# Altium PCB Probe.PcbDoc (part 1 of 2)
Units mm, origin at the board's own origin, x right, y up, seen from the top; angles counter-clockwise.
Board outline 70.88 x 20 mm, 4 copper layers (Top, Ground, Signal/Power, Bottom), stack 1.516 mm thick; 62 components, 37 nets, 170 pads, 258 vias.
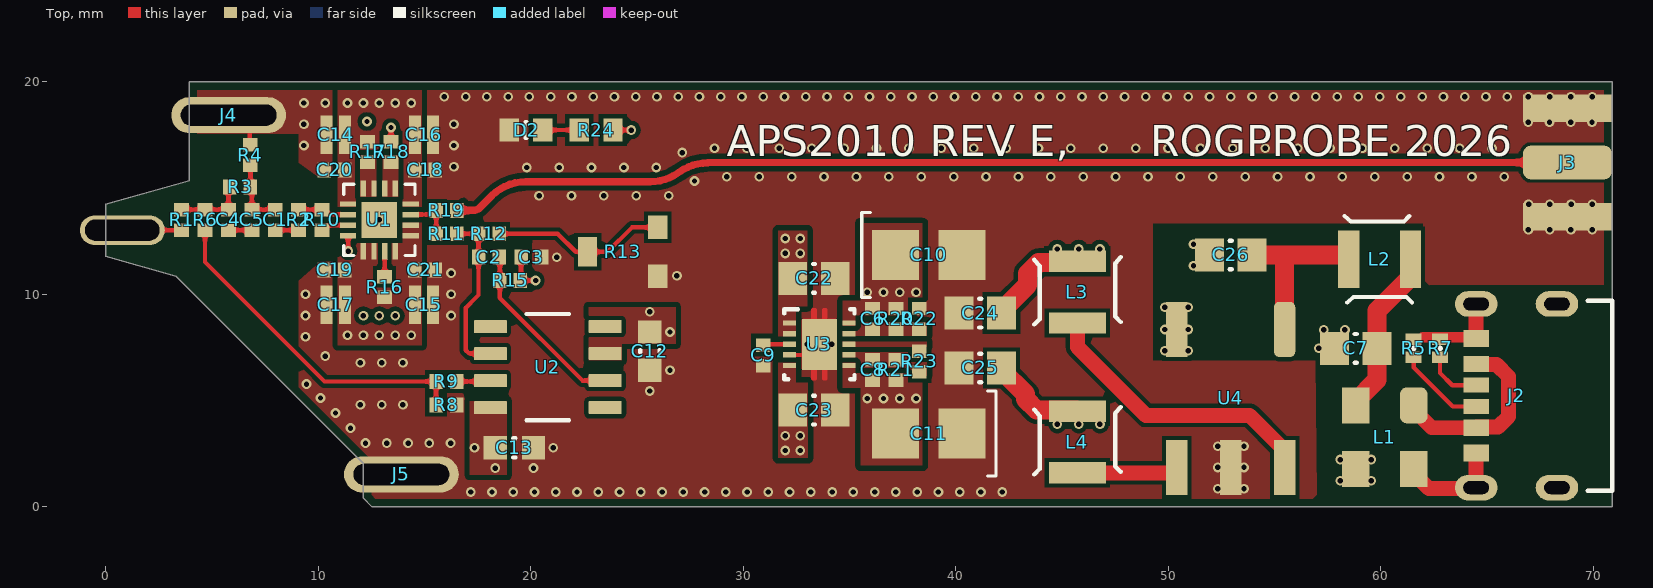
[diagram p0: Top view]
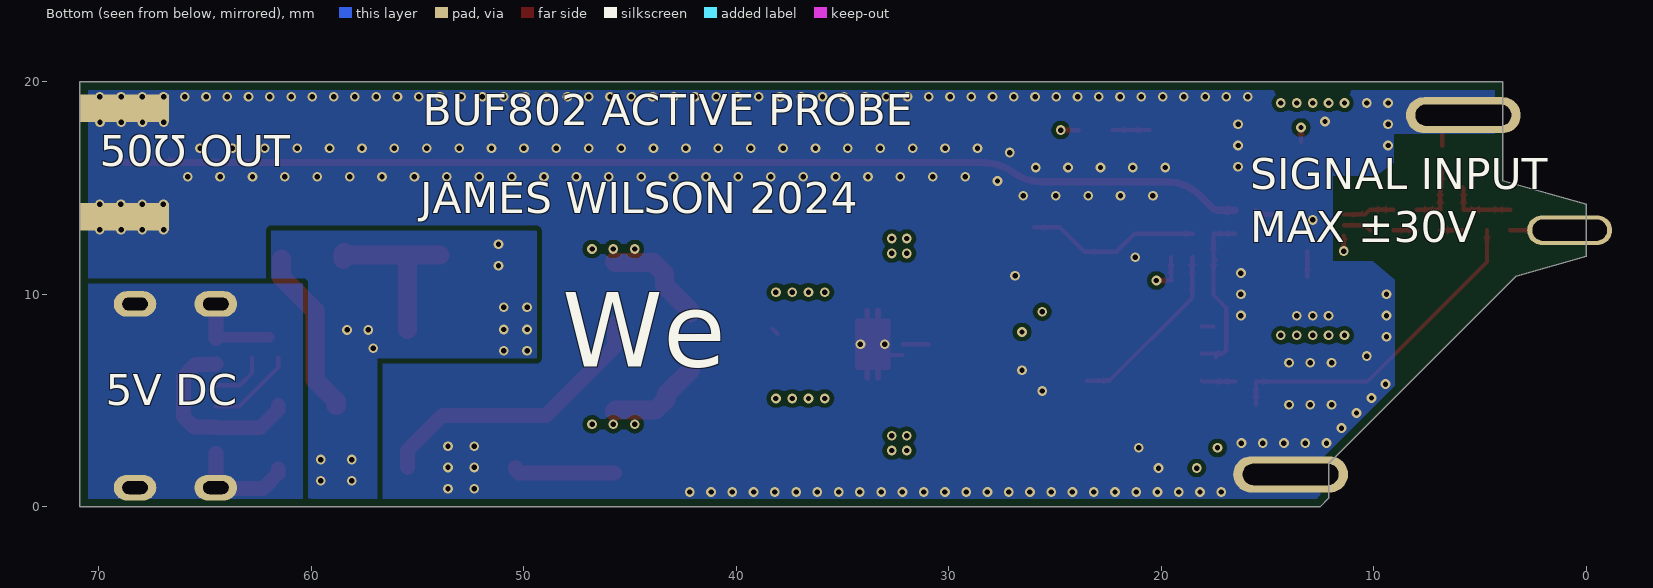
[diagram p1: Bottom view, seen from below]
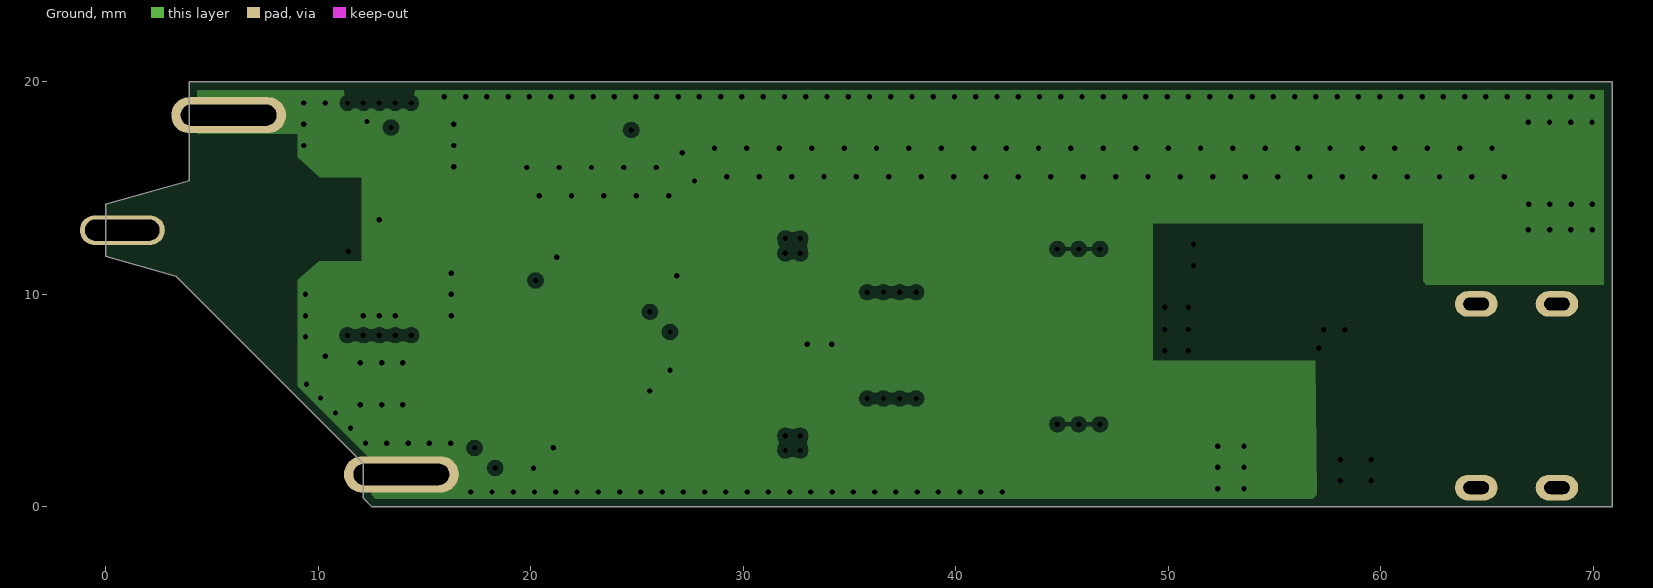
[diagram p2: Ground]
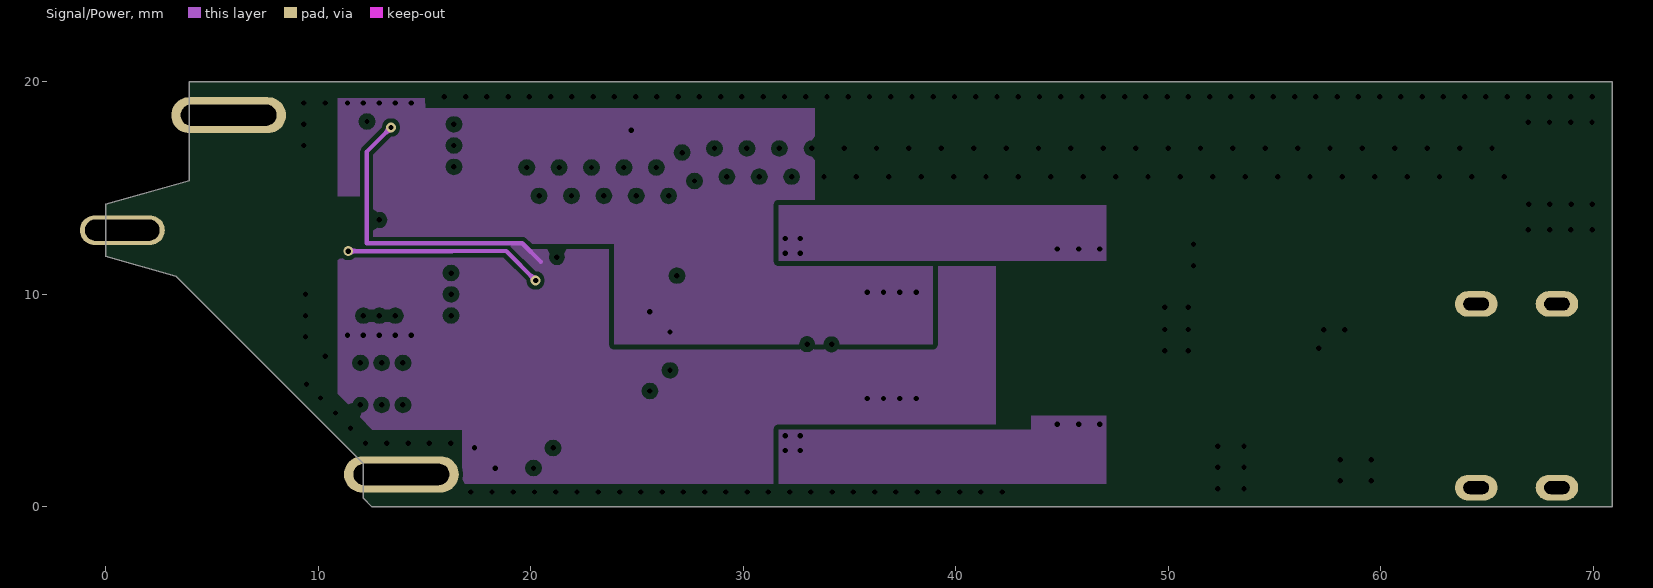
[diagram p3: Signal/Power]
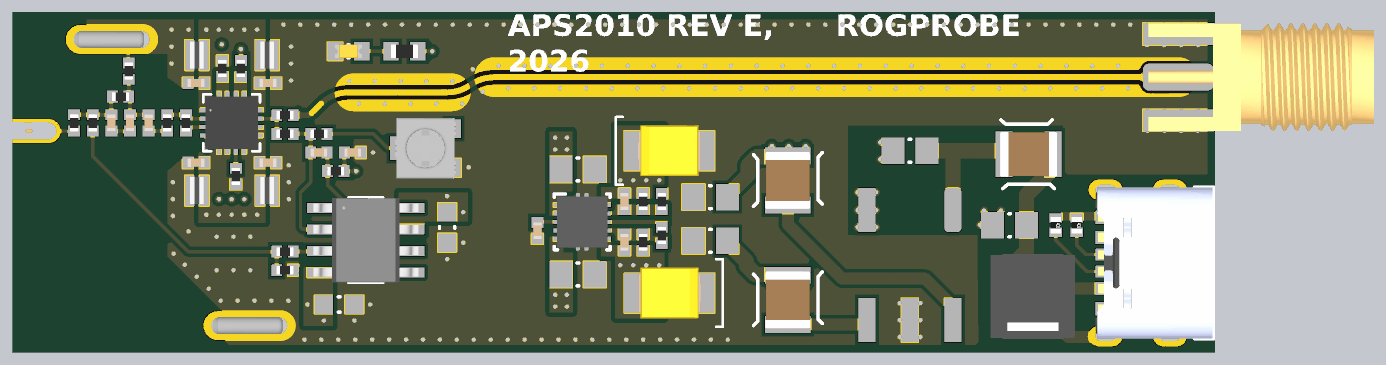
[diagram p4: 3D render of the assembled board from above, using the file's embedded part models]

## Layer stack, top to bottom
Top Solder: solder mask 0.0254, Solder Resist, Dk 3.5
Top: signal copper 0.0432
Dielectric 1: core 0.2022, FR-4, Dk 3.68
Ground: signal copper 0.0173
Dielectric 3: core 0.9906, Dk 3.68
Signal/Power: signal copper 0.0173
Dielectric 4: prepreg 0.2022, Dk 3.68
Bottom: signal copper 0.0432
Bottom Solder: solder mask 0.0254, Solder Resist, Dk 3.5

## Board outline
0,11.791 3.308,10.859 3.301,10.855 12.131,2.025 12.131,0.403 12.535,0 14.156,0 70.881,0 70.881,20 3.931,20 3.931,15.367 3.938,15.342 0,14.244

## Design rules (kind name [scope] priority, off if disabled: settings)
BoardOutlineClearance BoardOutlineClearance_outer [OnCopper and OnOutside] p1: gap=0.381 ignorepadtopadclearanceinfootprint=FALSE except(0: SMDPad-OutlineEdge)
BoardOutlineClearance BoardOutlineClearance_L3 [OnLayer('Signal/Power')] p2: gap=0.762 ignorepadtopadclearanceinfootprint=FALSE
BoardOutlineClearance BoardOutlineClearance_inner [OnCopper and not OnOutside] p3: gap=0.381 ignorepadtopadclearanceinfootprint=FALSE except(0: Fill-OutlineEdge Region-OutlineEdge)
Clearance Clearance_RF_CPWG [InNet('OUT') vs InNet('GND')] p1: gap=0.152 ignorepadtopadclearanceinfootprint=FALSE except(0.254: Arc-Fill Arc-Poly Arc-Region Track-Fill Track-Poly Track-Region Fill-Fill Fill-Poly Fill-Region Poly-Poly Poly-Region Region-Region)
Clearance [All] p2: gap=0.152 ignorepadtopadclearanceinfootprint=FALSE except(0.203: Arc-Poly Track-Poly SMDPad-Poly THPad-Poly Via-Poly; 0.254: Arc-Hole Track-Hole SMDPad-Hole THPad-Hole Via-Hole Fill-Fill Fill-Poly Fill-Region Fill-Hole Poly-Poly Poly-Hole Region-Hole)
HoleSize [All] p1: absolutevalues=TRUE maxlimit=6.35 minlimit=0.254 maxpercent=80.000 minpercent=20.000
MinimumSolderMaskSliver [All] p1: minsoldermaskwidth=0.102
PlaneConnect [All] p1: planeconnectstyle=Direct reliefexpansion=0.508 reliefentries=4 reliefconductorwidth=0.254 reliefairgap=0.254
PolygonConnect PolygonConnect_Relief [InComponentClass('Power plane relief') vs InNet('GND') OR InNet('VEE') OR InNet('VCC')] p1: connectstyle=Relief reliefconductorwidth=0.254 reliefentries=4 polygonreliefangle="90 Angle" airgapwidth=0.203
PolygonConnect [All] p2: connectstyle=Direct reliefconductorwidth=0.254 reliefentries=4 polygonreliefangle="90 Angle" airgapwidth=0.254
RoutingVias [All] p1: holewidth=0.457 width=0.457 viastyle="Through Hole" minholewidth=0.203 minwidth=0.457 maxholewidth=0.711 maxwidth=1.27
SilkToSolderMaskClearance [IsPad] p1: minsilkscreentomaskgap=0.127 clearancetoexposedcopper=TRUE
SolderMaskExpansion [All] p1: expansion=0.051 istentingtop=FALSE
Width [All] p1: maxlimit=5.08 minlimit=0.102 preferedwidth=0.254
26 further rules are at their usual default settings.

## Classes and differential pairs
net class Power: +9V -9V GND V+ V- VCC VEE
component class Power: C6 C7 C8 C9 C10 C11 C12 C13 C14 C15 C16 C17 C18 C19 C20 C21 C22 C23 C24 C25 C26 D2 J2 L1 L2 L3 L4 R5 R7 R20 R21 R22 R23 R24 U3 U4
component class Probe: C1 C2 C3 C4 C5 J3 J4 J5 R1 R2 R3 R4 R6 R8 R9 R10 R11 R12 R13 R15 R16 R17 R18 R19 U1 U2

## Components (designator, comment, footprint, x,y, rotation, side; value= is the part's Value field where it differs from the comment)
C1 "330p" CAPC0402(1005)50_M 7.981,13.5 r270 top
C2 "47p" CAPC0402(1005)50_M 18.031,11.75 r0 top
C3 "100p" CAPC0402(1005)50_M 20.031,11.75 r0 top
C4 "1.1p" CAPC0402(1005)50_M 5.781,13.5 r270 top
C5 "1.3p" CAPC0402(1005)50_M 6.881,13.5 r90 top
C6 "10n" CAPC0402(1005)50_M 36.081,8.85 r90 top
C7 "4.7u" CAPC0805(2012)100_M 58.818,7.457 r180 top
C8 "10n" CAPC0402(1005)50_M 36.081,6.45 r270 top
C9 "10n" CAPC0402(1005)50_M 30.939,7.132 r270 top
C10 "22u" "KEMET B_M" 38.731,11.85 r180 top
C11 "22u" "KEMET B_M" 38.731,3.45 r0 top
C12 "100n" CAPC0603(1608)100_M 25.606,7.325 r270 top
C13 "100n" CAPC0603(1608)100_M 19.231,2.775 r180 top
C14 "100n LICC" CAPC0306_M 10.831,17.5 r180 top
C15 "100n LICC" CAPC0306_M 14.981,9.5 r180 top
C16 "100n LICC" CAPC0306_M 14.981,17.5 r0 top
C17 "100n LICC" CAPC0306_M 10.831,9.5 r0 top
C18 "10n" CAPC0402(1005)50_M 15.031,15.85 r0 top
C19 "10n" CAPC0402(1005)50_M 10.781,11.15 r0 top
C20 "10n" CAPC0402(1005)50_M 10.781,15.85 r180 top
C21 "10n" CAPC0402(1005)50_M 15.031,11.15 r180 top
C22 "4.7u" CAPC0805(2012)100_M 33.331,10.75 r0 top
C23 "4.7u" CAPC0805(2012)100_M 33.331,4.55 r180 top
C24 "4.7u" CAPC0805(2012)100_M 41.152,9.112 r180 top
C25 "4.7u" CAPC0805(2012)100_M 41.152,6.534 r180 top
C26 "4.7u" CAPC0805(2012)100_M 52.931,11.85 r180 top
D2 "VLMTG1300-GS08" LED0603(1608)_M 19.781,17.725 r0 top
J2 "USB- C" GCT_USB4125-GF-A_REVA2 67.481,5.225 r90 top value=USB-TYPE-C-009
J3 "BWSMA-KE-P001" BATWIRELESS_BWSMA-KE-P001 70.881,16.2 r90 top
J4 "0339-0-15-01-15-27-10-0" "MILL-MAX 0339"#1 5.791,18.427 r0 top value=50935-6
J5 "0339-0-15-01-15-27-10-0" "MILL-MAX 0339"#2 13.983,1.528 r0 top value=50935-6
L1 "Choke" SDCW3225 61.543,4.774 r180 top value=DLW5BTM142SQ2L
L2 "Inductor" SML-1210 59.939,11.65 r180 top value=6.8uH
L3 "Inductor" SML-1210 45.724,10.1 r90 top value=22uH
L4 "Inductor" SML-1210 45.724,3.05 r90 top value=22uH
R1 "100" RESC0402(1005)_M 3.581,13.5 r90 top
R2 "0" RESC0402(1005)_M 9.081,13.5 r90 top
R3 "1.60M" RESC0402(1005)_M 6.331,15.05 r0 top
R4 "422K" RESC0402(1005)_M 6.806,16.55 r90 top
R5 "Res" SMR-0402 61.543,7.457 r270 top value=5.1K
R6 "1.91M" RESC0402(1005)_M 4.681,13.5 r270 top
R7 "Res" SMR-0402 62.781,7.457 r270 top value=5.1K
R8 "66.5k" RESC0402(1005)_M 16.031,4.8 r0 top value=66.5K
R9 "68" RESC0402(1005)_M 16.031,5.9 r0 top
R10 "10.0M" RESC0402(1005)_M 10.181,13.5 r270 top
R11 "51.0K" RESC0402(1005)_M 16.031,12.85 r180 top
R12 "10.0K" RESC0402(1005)_M 18.031,12.85 r0 top
R13 "1k" PVG3A 24.331,12 r90 top
R15 "5.60K" RESC0402(1005)_M 19.031,10.65 r180 top
R16 "17.8k" RESC0402(1005)_M 13.131,10.342 r270 top value=17.8K
R17 "1.00K" RESC0402(1005)_M 12.331,16.7 r90 top
R18 "1.00K" RESC0402(1005)_M 13.431,16.7 r90 top
R19 "49.9" RESC0402(1005)_M 16.031,13.95 r0 top
R20 "41.2k" RESC0402(1005)_M 37.181,8.85 r270 top value=41.2K
R21 "91.0K" RESC0402(1005)_M 37.181,6.45 r270 top
R22 "10.2k" RESC0402(1005)_M 38.281,8.85 r90 top value=10.2K
R23 "18.0K" RESC0402(1005)_M 38.281,6.85 r90 top
R24 "4.70K" RESC0603(1608)_M 23.081,17.725 r180 top
U1 "BUF802" "VQFN16_RGT_TEX- OSHPARK" 12.881,13.5 r0 top
U2 "OPA140" SOIC-8 20.806,6.575 r0 top
U3 "TPS7A39" DSC0010J_NV 33.581,7.65 r0 top
U4 "MTU1D0509MC" MTU1D0509MC 52.931,5.1 r270 top

## Footprints (in the part's own frame and the unit in brackets; to place one, negate y for a bottom-side part, rotate by r counter-clockwise, add the part's x,y. Pads: shape width x height; smd on the part's side, far side on the other; paste and mask are expansions set on the pad)
BATWIRELESS_BWSMA-KE-P001 [mm]
  rrect50% 1.6x4.2 smd: 1(0,2.1)
  rect 1.3x4.2 smd: 2(-2.55,2.1) 2(2.55,2.1)
  rect 1.3x4.2 smd far side: 2(-2.55,2.1) 2(2.55,2.1)
  body extent -3.17,-9.46 3.18,3.87, height 3.55
CAPC0306_M [mm] "CAPC0306(0510)_M"
  rect 0.56x1.81 smd: 1(-0.43,0) 2(0.43,0)
  body extent -0.4,-0.8 0.4,0.8, height 0.55
CAPC0402(1005)50_M [mm] "Chip Capacitor, Body 1.0x0.5mm, Height 0.5mm, IPC Low  Density"
  rect 0.635x0.7 smd: 1(-0.483,0) 2(0.483,0)
  body extent -0.5,-0.25 0.5,0.25, height 0.5
CAPC0603(1608)100_M [mm] "Chip Capacitor, Body 1.6x0.8mm, Height 1.0mm, IPC Low Density"
  rect 1.1x1.1 smd: 1(-0.9,0) 2(0.9,0)
  silkscreen extent -0.05,-0.45 0.05,0.45, body extent -0.87,-0.48 0.88,0.48, height 1
CAPC0805(2012)100_M [mm] "Chip Capacitor, Body 2.0x1.2mm, Height 1.0mm, IPC Low Density"
  rect 1.35x1.55 smd: 1(-1,0) 2(1,0)
  silkscreen extent -0.05,-0.67 0.05,0.67, body extent -1.1,-0.72 1.1,0.72, height 1
DSC0010J_NV [mm]
  rect 0.6x0.25 smd: 1(-1.4,1) 2(-1.4,0.5) 3(-1.4,0) 4(-1.4,-0.5) 5(-1.4,-1) 6(1.4,-1) 7(1.4,-0.5) 8(1.4,0) 9(1.4,0.5) 10(1.4,1)
  rect 1.65x2.4 smd paste-1.187 mask-1.181: 11(0,0)
  Top region: -0.325,-1.7 -0.375,-1.65 -0.375,-1.2 -0.775,-1.2 -0.825,-1.15 -0.825,1.15 -0.775,1.2 -0.375,1.2 -0.375,1.65 -0.325,1.7 -0.325,1.7 -0.175,1.7 -0.175,1.7 -0.125,1.65 -0.125,1.2 0.125,1.2 0.125,1.65 0.175,1.7 0.175,1.7 0.325,1.7 0.325,1.7 0.375,1.65 0.375,1.2 0.775,1.2 0.825,1.15 0.825,-1.15 0.775,-1.2 0.375,-1.2 0.375,-1.65 0.325,-1.7 0.175,-1.7 0.125,-1.65 0.125,-1.2 -0.125,-1.2 -0.125,-1.65 -0.175,-1.7
  silkscreen extent -1.65,-1.65 1.65,1.65, body extent -1.5,-1.5 1.5,1.5, height 0.8
GCT_USB4125-GF-A_REVA2 [mm]
  rect 0.7x1.2 smd: A5(-0.5,3) B5(0.5,3)
  rect 0.76x1.2 smd: A9(1.5,3) B9(-1.5,3)
  rect 0.8x1.2 smd: A12(2.7,3) B12(-2.7,3)
  oval 1.2x2 hole 0.6 slot 1.2 at 90 deg: S1(-4.32,3) S2(4.32,3) S3(-4.32,-0.8) S4(4.32,-0.8)
  silkscreen extent -4.47,-3.4 4.47,-2.25, body extent -4.47,-3.32 4.47,3.58, height 3.26
"KEMET B_M" [mm] "KEMET B lowest density"
  rect 2.21x2.35 smd: 1(1.565,0) 2(-1.565,0)
  silkscreen extent 2.76,-2 3.16,2, body extent -1.85,-1.5 1.85,1.5, height 2.1
LED0603(1608)_M [mm] "Chip Resistor, Body 1.6x0.8mm, IPC Low Density"
  rect 0.908x1.079 smd: 1(0.79,0) 2(-0.79,0)
  silkscreen extent -0.05,-0.4 0.05,0.4, body extent -0.8,-0.4 0.8,0.4, height 0.8
"MILL-MAX 0339"#1 [mm] "MILL-MAX 0339"
  oval 5.4x1.7 hole 1 slot 4.5 at 0 deg: 1(0,0)
  body extent -2.36,-0.7 1.9,0.7
"MILL-MAX 0339"#2 [mm] "MILL-MAX 0339"
  oval 5.4x1.7 hole 1 slot 4.5 at 0 deg: 1(-0.065,0)
  body extent -2.36,-0.7 1.9,0.7
MTU1D0509MC [mm]
  rrect50% 2.6x1 smd: 1(-3.25,2.54)
  rect 2.6x1 smd: 3(-3.25,-2.54) 4(3.25,-2.54) 5(3.25,0) 6(3.25,2.54)
  body extent -3.94,-3.81 3.68,3.81, height 8.5
PVG3A [mm] "SMD Sealed Type Single-Turn PVG3"
  rect 1.1x0.9 smd: 1(1.15,-1.65) 3(-1.15,-1.65)
  rect 1.4x0.9 smd: 2(0,1.65)
  body extent -1.8,-1.8 1.8,1.8, height 1.94
RESC0402(1005)_M [mm] "Chip Resistor, Body 1.0x0.5mm, IPC Low Density"
  rect 0.635x0.7 smd: 1(-0.483,0) 2(0.482,0)
  body extent -0.5,-0.25 0.5,0.25, height 0.35
RESC0603(1608)_M [mm] "Chip Resistor, Body 1.6x0.8mm, IPC Low Density"
  rect 0.908x1.079 smd: 1(-0.79,0) 2(0.79,0)
  body extent -0.8,-0.4 0.8,0.4, height 0.45
SDCW3225 [mm]
  rrect50% 1.3x1.7 smd: 1(0,0)
  rect 1.3x1.7 smd: 2(2.725,0) 3(2.725,2.999) 4(0,2.999)
  body extent -1.15,-0.97 3.85,4.03, height 2.5
SML-1210 [mm]
  rect 1x2.7 smd: 1(-1.45,0) 2(1.45,0)
  silkscreen extent -1.52,-2.03 1.65,2.03, body extent -1.7,-1.35 1.7,1.35, height 2.7
SMR-0402 [mm]
  rect 0.55x0.75 smd: 1(-0.425,0) 2(0.425,0)
  silkscreen extent -0.03,-0.03 0.03,0.03, body extent -0.5,-0.3 0.5,0.3, height 0.2
SOIC-8 [mm] "SOIC-8"
  rrect8% 1.55x0.6 smd: 1(-2.7,1.905) 2(-2.7,0.635) 3(-2.7,-0.635) 4(-2.7,-1.905) 5(2.7,-1.905) 6(2.7,-0.635) 7(2.7,0.635) 8(2.7,1.905)
  silkscreen extent -1,-2.5 1,2.5, body extent -3.1,-2.5 3.1,2.5, height 1.76
"VQFN16_RGT_TEX- OSHPARK" [mil]
  rect 30x10 smd: 1(-58,29.54) 2(-58,9.85) 3(-58,-9.85) 4(-58,-29.53) 9(58,-29.53) 10(58,-9.85) 11(58,9.85) 12(58,29.54)
  rect 10x30 smd: 5(-29.53,-58) 6(-9.85,-58) 7(9.85,-58) 8(29.54,-58) 13(29.54,58) 14(9.85,58) 15(-9.85,58) 16(-29.53,58)
  rect 66.14x66.14 smd: 17(0,0)
  silkscreen extent -66,-66 66,66, body extent -61,-61 61,61, height 39

## Part data
C1: library part GRM1555C1H331JA01, "CAP CER 330PF±5% 50V C0G 0402", Capacitance=330pF, Manufacturer=Murata, Manufacturer Part Number=GRM1555C1H331JA01D, Temperature Coefficient=C0G, Tolerance=±5%, Part Number=GRM1555C1H331JA01
C2: library part CL05C470JB5NNN, "CAP CER 47PF±5% 50V C0G 0402", Capacitance=47pF, Manufacturer="Samsung Electro-Mechanics", Manufacturer Part Number=CL05C470JB5NNNC, Temperature Coefficient=C0G, Tolerance=±5%, Voltage Rating=50V, Part Number=CL05C470JB5NNN
C3: library part CL05C101JB5NNN, "CAP CER 100PF±5% 50V C0G 0402", Capacitance=100pF, Manufacturer="Samsung Electro-Mechanics", Manufacturer Part Number=CL05C101JB5NNNC, Temperature Coefficient=C0G, Tolerance=±5%, Voltage Rating=50V, Part Number=CL05C101JB5NNN
C4: library part GJM1555C1H1R1WB01, "CAP CER 1.1PF±0.05PF 50V C0G/NP0 0402", Capacitance=1.1pF, Manufacturer=Murata, Manufacturer Part Number=GJM1555C1H1R1WB01D, Temperature Coefficient=C0G, Tolerance=±0.05pF, Part Number=GJM1555C1H1R1WB01
C5: library part GJM1555C1H1R3WB01, "CAP CER 1.3PF±0.05PF 50V C0G/NP0 0402", Capacitance=1.3pF, Manufacturer=Murata, Manufacturer Part Number=GJM1555C1H1R3WB01D, Temperature Coefficient=C0G, Tolerance=±0.05pF, Part Number=GJM1555C1H1R3WB01
C6 C8 C9: library part GRM1555C1E103JE01, "CAP CER 10NF±5% 25V C0G 0402", Capacitance=10nF, Manufacturer=Murata, Manufacturer Part Number=GRM1555C1E103JE01D, Temperature Coefficient=C0G, Tolerance=±5%, Part Number=GRM1555C1E103JE01
C7 C22 C23 C24 C25 C26: library part GRM21BZ71H475KE15K, "CAP CER 4.7UF 50V X7R 0805", Manufacturer=Murata, Supplier Part Number 1=490-GRM21BZ71H475KE15KCT-ND, ComponentLink1Description=https://datasheet.octopart.com/GRM21BZ71H475KE15K-Murata-datasheet-149523520.pdf?src-supplier=Newark, ComponentLink1URL=https://datasheet.octopart.com/GRM21BZ71H475KE15K-Murata-datasheet-149523520.pdf?src-supplier=Newark, ComponentLink2Description=https://datasheet.octopart.com/GRM21BZ71H475KE15K-Murata-datasheet-165579666.pdf?src-supplier=TME, ComponentLink2URL=https://datasheet.octopart.com/GRM21BZ71H475KE15K-Murata-datasheet-165579666.pdf?src-supplier=TME, Manufacturer Part Number=GRM21BZ71H475KE15K, Pricing 1="1=0.6, 10=0.444, 50=0.3554, 100=0.3047, 500=0.2412, 1000=0.20311, 2500=0.19042, 5000=0.17772 (USD)", RoHS Compliant=Yes, Stock 1=134344, Supplier 1=Digi-Key, Supplier 2=Mouser, Supplier Part Number 2=81-GRM21BZ71H475KE5K
C10 C11: library part T491B226K016AT, "CAP TANT 22UF 10% 16V 1411", Capacitance=22uF, Case/Package=1411, Case Code (Metric)=3528, Dielectric Material=Tantalum, ESR (Equivalent Series Resistance)=2.2R, Leakage Current=3.6uA, Manufacturer=KEMET, Max Operating Temperature=125°C, Min Operating Temperature=-55°C, Package Quantity=1, Ripple Current=197mA, Supplier Part Number 1=399-8312-6-ND, Tolerance=10%, Voltage=16V, Case Code (Imperial)=1411, ComponentLink1Description=https://datasheet.ciiva.com/8079/kem-t2005-t491-8079799.pdf?src-supplier=Element14, ComponentLink1URL=https://datasheet.ciiva.com/8079/kem-t2005-t491-8079799.pdf?src-supplier=Element14, ComponentLink2Description=https://datasheet.ciiva.com/7696/1854511-7696325.pdf?src-supplier=Element14, ComponentLink2URL=https://datasheet.ciiva.com/7696/1854511-7696325.pdf?src-supplier=Element14, ComponentLink3Description=https://datasheet.ciiva.com/7696/1446014-7696326.pdf?src-supplier=Element14, ComponentLink3URL=https://datasheet.ciiva.com/7696/1446014-7696326.pdf?src-supplier=Element14, ComponentLink4Description=https://datasheet.ciiva.com/5934/1446014-5934574.pdf?src-supplier=Farnell, ComponentLink4URL=https://datasheet.ciiva.com/5934/1446014-5934574.pdf?src-supplier=Farnell, ComponentLink5Description=https://datasheet.ciiva.com/6247/kem-t2005-t491-6247978.pdf?src-supplier=Digikey, ComponentLink5URL=https://datasheet.ciiva.com/6247/kem-t2005-t491-6247978.pdf?src-supplier=Digikey, ComponentLink6Description=https://datasheet.ciiva.com/6247/kem-t2005-t491-6247977.pdf?src-supplier=Digikey, ComponentLink6URL=https://datasheet.ciiva.com/6247/kem-t2005-t491-6247977.pdf?src-supplier=Digikey, ComponentLink7Description=https://datasheet.ciiva.com/6247/kem-t2005-t491-6247979.pdf?src-supplier=Digikey, ComponentLink7URL=https://datasheet.ciiva.com/6247/kem-t2005-t491-6247979.pdf?src-supplier=Digikey, ComponentLink8Description=https://datasheet.ciiva.com/14589/70095774-14589317.pdf?src-supplier=Allied+Electronics, ComponentLink8URL=https://datasheet.ciiva.com/14589/70095774-14589317.pdf?src-supplier=Allied+Electronics, ComponentLink9Description=https://datasheet.ciiva.com/14600/70095774-14600348.pdf?src-supplier=Allied+Electronics, ComponentLink9URL=https://datasheet.ciiva.com/14600/70095774-14600348.pdf?src-supplier=Allied+Electronics, ComponentLink10Description=https://datasheet.ciiva.com/12911/kem-t2005-t491-12911727.pdf?src-supplier=Mouser, ComponentLink10URL=https://datasheet.ciiva.com/12911/kem-t2005-t491-12911727.pdf?src-supplier=Mouser, ComponentLink11Description=https://datasheet.ciiva.com/29244/458294-da-01-en-tantal-kondensator-t491b226k016at-29244581.pdf?src-supplier=Conrad, ComponentLink11URL=https://datasheet.ciiva.com/29244/458294-da-01-en-tantal-kondensator-t491b226k016at-29244581.pdf?src-supplier=Conrad, Construction=Flat, Depth=2.8mm, Dissipation Factor=6%, Failure Rate=0.001%, Features="General Purpose", Height=1.9mm, Height - Seated (Max)=0.083inch, Lead Free="Lead Free", Lead Pitch=1.9mm, Length=3.5mm, Life (Hours)=2000Hour, Manufacturer Part Number=T491B226K016AT, Mount="Surface Mount,PCB", Number of Pins=2, Packaging="Tape and Reel", Polarity=Polar, Pricing 1="1=0.64, 10=0.433, 50=0.3444, 100=0.2844, 500=0.2222, 1000=0.18887 (USD)", Radiation Hardening=No, Reach SVHC Compliant=Yes, RoHS Compliant=Yes, Series=T491, Stock 1=3174, Supplier 1=Digikey, Supplier 2=Mouser, Supplier Part Number 2=80-T491B226K016, Termination=SMD/SMT, Voltage Rating=16V, Voltage Rating (DC)=16V, Weight=0.002293oz, Width=2.8mm
C12 C13: library part CC0603KRX7R9BB104, "CAPACITOR CERAMIC, 0.1UF, 50V, X7R, 10%, 0603", Capacitance=100nF, Case/Package=0603, Case Code (Metric)=1608, Dielectric=X7R, Dielectric Material=Ceramic, LCSC PART #=C14663, Manufacturer=Yageo, Max Operating Temperature=125°C, Min Operating Temperature=-55°C, Package Quantity=1, Supplier Part Number 1=311-1344-1-ND, Tolerance=10%, Voltage=50V, Case Code (Imperial)=0603, ComponentLink1Description=http://www.yageo.com/documents/recent/UPY-GPHC_X7R_6.3V-to-50V_18.pdf?src-supplier=Digi-Key, ComponentLink1URL=http://www.yageo.com/documents/recent/UPY-GPHC_X7R_6.3V-to-50V_18.pdf?src-supplier=Digi-Key, ComponentLink2Description=http://www.farnell.com/datasheets/1489800.pdf?src-supplier=Element14, ComponentLink2URL=http://www.farnell.com/datasheets/1489800.pdf?src-supplier=Element14, ComponentLink3Description=http://www.yageo.com/documents/recent/UPY-GPHC_X7R_6.3V-to-50V_8.pdf?src-supplier=Avnet+Europe, ComponentLink3URL=http://www.yageo.com/documents/recent/UPY-GPHC_X7R_6.3V-to-50V_8.pdf?src-supplier=Avnet+Europe, ComponentLink4Description=http://www.farnell.com/datasheets/2167236.pdf?src-supplier=Element14, ComponentLink4URL=http://www.farnell.com/datasheets/2167236.pdf?src-supplier=Element14, ComponentLink5Description=http://www.farnell.com/datasheets/1489800.pdf?src-supplier=Farnell, ComponentLink5URL=http://www.farnell.com/datasheets/1489800.pdf?src-supplier=Farnell, Depth=0.8mm, Halogen Free="Halogen Free", Height=0.8mm, Lead Free="Lead Free", Length=1.6mm, Manufacturer Part Number=CC0603KRX7R9BB104, Mount="Surface Mount", Number of Pins=2, Packaging="Tape and Reel", Pricing 1="1=0.1, 10=0.066, 50=0.036, 100=0.0293, 500=0.02094, 1000=0.01646 (USD)", Radiation Hardening=No, REACH SVHC="No SVHC", Stock 1=0, Supplier 1=Digi-Key, Supplier 2=Mouser, Supplier Part Number 2=603-CC603KRX7R9BB104, Termination=SMD/SMT, Thickness=0.035inch, Voltage Rating=50V, Width=0.031inch
C14 C15 C16 C17: library part TWK107B7104MVHT, "CAP CER 0.1UF 25V X7R 0306", Capacitance=100nF, Case Code (Imperial)=0306, Case Code (Metric)=0816, Manufacturer="Taiyo Yuden", Max Operating Temperature=125°C, Min Operating Temperature=-55°C, Ratings=AEC-Q200, Supplier Part Number 1=587-6181-1-ND, Tolerance=20%, Voltage Rating=25V, Case/Package=0306, ComponentLink1Description=http://ds.yuden.co.jp/TYCOMPAS/ut/detail.do?productNo=TWK107B7104MVHT&amp;fileName=TWK107B7104MVHT_SS&amp;mode=specSheetDownload&src-supplier=Digi-Key, ComponentLink1URL=http://ds.yuden.co.jp/TYCOMPAS/ut/detail.do?productNo=TWK107B7104MVHT&amp;fileName=TWK107B7104MVHT_SS&amp;mode=specSheetDownload&src-supplier=Digi-Key, ComponentLink2Description="https://ds.yuden.co.jp/TYCOMPAS/ut/detail?pn=TWK107B7104MVHT &amp;u=M&src-supplier=Digi-Key", ComponentLink2URL="https://ds.yuden.co.jp/TYCOMPAS/ut/detail?pn=TWK107B7104MVHT &amp;u=M&src-supplier=Digi-Key", Manufacturer Part Number=TWK107B7104MVHT, Mount="Surface Mount", Packaging="Tape and Reel", Pricing 1="1=0.31, 10=0.219, 50=0.153, 100=0.1312, 500=0.0984, 1000=0.08309 (USD)", RoHS Compliant=Yes, Stock 1=9611, Supplier 1=Digi-Key, Supplier 2=Mouser, Supplier Part Number 2=963-TWK107B7104MVHT, Supplier Part Number 3=CL0306KRX7R6BB104
C18 C19 C20 C21: library part GRM155R71H103KA88, "CAP CER 10NF±10% 50V X7R 0402", Capacitance=10nF, Manufacturer=Murata, Manufacturer Part Number=GRM155R71H103KA88D, Temperature Coefficient=X7R, Tolerance=±10%, Part Number=GRM155R71H103KA88
D2: "LED GREEN 0603 SMD", Case/Package=0603, Case Code (Metric)=1608, Color=Green, Forward Current=20mA, Forward Voltage=3.2V, Manufacturer="Vishay Semiconductors", Max Operating Temperature=85°C, Max Power Dissipation=76mW, Min Operating Temperature=-35°C, Package Quantity=1, Power Rating=75mW, Supplier Part Number 1=VLMTG1300-GS08CT-ND, Case Code (Imperial)=0603, ComponentLink1Description=https://datasheet.ciiva.com/26322/vlmo1300-26322149.pdf?src-supplier=Element14, ComponentLink1URL=https://datasheet.ciiva.com/26322/vlmo1300-26322149.pdf?src-supplier=Element14, ComponentLink2Description=https://datasheet.ciiva.com/8028/vlmo1300-8028077.pdf?src-supplier=Element14, ComponentLink2URL=https://datasheet.ciiva.com/8028/vlmo1300-8028077.pdf?src-supplier=Element14, ComponentLink3Description=https://datasheet.ciiva.com/16510/vlmo1300-16510989.pdf?src-supplier=Future+Electronics, ComponentLink3URL=https://datasheet.ciiva.com/16510/vlmo1300-16510989.pdf?src-supplier=Future+Electronics, ComponentLink4Description=https://datasheet.ciiva.com/2115/vlmo1300-2115107.pdf?src-supplier=Digi-Key, ComponentLink4URL=https://datasheet.ciiva.com/2115/vlmo1300-2115107.pdf?src-supplier=Digi-Key, ComponentLink5Description=https://datasheet.ciiva.com/2115/vlmo1300-2115108.pdf?src-supplier=Digi-Key, ComponentLink5URL=https://datasheet.ciiva.com/2115/vlmo1300-2115108.pdf?src-supplier=Digi-Key, ComponentLink6Description=https://datasheet.ciiva.com/2115/vlmo1300-2115106.pdf?src-supplier=Digi-Key, ComponentLink6URL=https://datasheet.ciiva.com/2115/vlmo1300-2115106.pdf?src-supplier=Digi-Key, Contact Plating=Tin,Matte, Depth=0.8mm, Dominant Wavelength=525nm, Height=0.8mm, Illumination Color=Green, Lead Free="Lead Free", Length=1.6mm, Lens Style=Rectangular,Clear, Luminous Intensity=450mcd, Manufacturer Part Number=VLMTG1300-GS08, Mount="Surface Mount", Number of Elements=1, Number of LEDs=1, Number of Pins=2, Packaging="Tape and Reel", Power Dissipation=76mW, Pricing 1="1=0.46, 10=0.305, 100=0.2033, 500=0.1406, 1000=0.11716 (USD)", Radiation Hardening=No, RoHS Compliant=Yes, Series=CHipLED, Stock 1=156996, Supplier 1=Digi-Key, Supplier 2=Mouser, Supplier Part Number 2=78-VLMTG1300-GS08, Test Current=20mA, Viewing Angle=130°, Wavelength=525nm, Width=0.8mm
J2: "USB Type C 3.1 connector", Distributor PartN=C2927029, DistributorAlt PartN=N/A, Manufacturer=DEALON, Manufacturer PartN=USB-TYPE-C-009, Distributor=LCSC, DistributorAlt=N/A, Parameters="USB Type C 3.1 9 pins"
J3: library part 901-10511-3, "CONN SMA JACK STR 50OHM EDGE MNT", Case/Package=SMA, Distributor PartN=C496550, Manufacturer="BAT WIRELESS", Max Frequency=26.5GHz, Max Operating Temperature=165°C, Min Operating Temperature=-65°C, Supplier Part Number 1=ARF2500-ND, Voltage Rating=170V, ComponentLink1Description=https://datasheet.octopart.com/901-10511-3-Amphenol-RF-datasheet-67291285.pdf?src-supplier=Element14, ComponentLink1URL=https://datasheet.octopart.com/901-10511-3-Amphenol-RF-datasheet-67291285.pdf?src-supplier=Element14, ComponentLink2Description=https://datasheet.octopart.com/901-10511-3-Amphenol-RF-datasheet-67291280.pdf?src-supplier=Newark, ComponentLink2URL=https://datasheet.octopart.com/901-10511-3-Amphenol-RF-datasheet-67291280.pdf?src-supplier=Newark, ComponentLink3Description=http://www.amphenolrf.com/media/downloads/7776/C901-10511-3.pdf?src-supplier=Digi-Key, ComponentLink3URL=http://www.amphenolrf.com/media/downloads/7776/C901-10511-3.pdf?src-supplier=Digi-Key, Connector Type=SMA, Contact Material=Copper, Distributor=LCSC, Impedance=50R, Manufacturer PartN=BWSMA-KE-P001, Mount=Edge,Board, Packaging=Bulk, RoHS Compliant=Yes, Series=-, Supplier 1=Digi-Key, Supplier 2=Mouser, Supplier Part Number 2=523-901-10511-3, Termination=Solder
J4 J5: "CONN PIN RCPT", Distributor PartN=C5439457, Manufacturer="TE Connectivity", Manufacturer PartN=50935-6, Distributor=LCSC, Parameters="Spring Socket"
L1: "Common Mode Choke Coils", Distributor PartN=C91596, DistributorAlt PartN=N/A, Manufacturer=Murata, Manufacturer PartN=DLW5BTM142SQ2L, Distributor=LCSC, DistributorAlt=N/A, Parameters="Common Mode Filters 1.4K@100MHz 56mOhm"
L2: Distributor PartN=C250230, Manufacturer=TDK, Manufacturer PartN=NLCV32T-6R8M-EF, Distributor=LCSC, Parameters="FIXED IND 6.8uH +/-20% 270mohm"
L3 L4: Distributor PartN=C88185, Manufacturer=TDK, Manufacturer PartN=MLZ20122P220WT000, Distributor=LCSC, Parameters="FIXED IND 22uH 1.25 Ohm"
R1: library part RESC0402-100R-1pct, "RES 100 OHM 1% 1/16W 0402", Manufacturer 1=Yageo, Manufacturer 2="Stackpole Electronics", Manufacturer 3="Vishay Dale", Manufacturer 4="Panasonic Electronic Components", Manufacturer Part Number 1=RC0402FR-07100RL, Manufacturer Part Number 2=RMCF0402FT100R, Manufacturer Part Number 3=CRCW0402100RFKED, Manufacturer Part Number 4=ERJ-2RKF1000X, Ohms=100, Part Number=RESC0402-100R-1pct
R2: library part R0402-0R0-JMP, "RES 0 OHM JUMPER 0402", Manufacturer 1=Yageo, Manufacturer 2="Stackpole Electronics", Manufacturer 3="Vishay Dale", Manufacturer 4="Panasonic Electronic Components", Manufacturer Part Number 1=RC0402FR-071RL, Manufacturer Part Number 2=RMCF0402FT1R00, Manufacturer Part Number 3=CRCW04021R00FNED, Manufacturer Part Number 4=ERJ-2GE0R00X, Ohms=0, Part Number=R0402-0R0-JMP
R3: library part RESC0402-1M60-1pct, "RES 1.60M OHM 1% 1/16W 0402", Manufacturer 1=Yageo, Manufacturer 2="Stackpole Electronics", Manufacturer 3="Vishay Dale", Manufacturer 4="Panasonic Electronic Components", Manufacturer Part Number 1=RC0402FR-071M6L, Manufacturer Part Number 2=RMCF0402FT1M60, Manufacturer Part Number 3=CRCW04021M60FKED, Ohms=1600000, Part Number=RESC0402-1M60-1pct
R4: library part RESC0402-422K-1pct, "RES 422K OHM 1% 1/16W 0402", Manufacturer 1=Yageo, Manufacturer 2="Stackpole Electronics", Manufacturer 3="Vishay Dale", Manufacturer 4="Panasonic Electronic Components", Manufacturer Part Number 1=RC0402FR-07422KL, Manufacturer Part Number 2=RMCF0402FT422K, Manufacturer Part Number 3=CRCW0402422KFKED, Manufacturer Part Number 4=ERJ-2RKF4223X, Ohms=422000, Part Number=RESC0402-422K-1pct
R5 R7: "Resistor", Distributor PartN=C105872, Manufacturer=YAGEO, Distributor=LCSC, Price=N/A
R6: library part RESC0402-1M91-1pct, "RES 1.91M OHM 1% 1/16W 0402", Manufacturer 1=Yageo, Manufacturer 2="Stackpole Electronics", Manufacturer 3="Vishay Dale", Manufacturer 4="Panasonic Electronic Components", Manufacturer Part Number 1=RC0402FR-071M91L, Manufacturer Part Number 2=RMCF0402FT1M91, Manufacturer Part Number 3=CRCW04021M91FKED, Ohms=1910000, Part Number=RESC0402-1M91-1pct
R8: library part RESC0402-66K5-1pct, "RES 66.5K OHM 1% 1/16W 0402", Manufacturer 1=Yageo, Manufacturer 2="Stackpole Electronics", Manufacturer 3="Vishay Dale", Manufacturer 4="Panasonic Electronic Components", Manufacturer Part Number 1=RC0402FR-0766K5L, Manufacturer Part Number 2=RMCF0402FT66K5, Manufacturer Part Number 3=CRCW040266K5FKED, Manufacturer Part Number 4=ERJ-2RKF6652X, Ohms=66500, Part Number=RESC0402-66K5-1pct
R9: library part RESC0402-68R0-1pct, "RES 68 OHM 1% 1/16W 0402", Manufacturer 1=Yageo, Manufacturer 2="Stackpole Electronics", Manufacturer 3="Vishay Dale", Manufacturer 4="Panasonic Electronic Components", Manufacturer Part Number 1=RC0402FR-0768RL, Manufacturer Part Number 2=RMCF0402FT68R0, Manufacturer Part Number 3=CRCW040268R0FKED, Manufacturer Part Number 4=ERJ-2RKF68R0X, Ohms=68, Part Number=RESC0402-68R0-1pct
R10: library part RESC0402-10M0-1pct, "RES 10.0M OHM 1% 1/16W 0402", Manufacturer 1=Yageo, Manufacturer 2="Stackpole Electronics", Manufacturer 3="Vishay Dale", Manufacturer 4="Panasonic Electronic Components", Manufacturer Part Number 1=RC0402FR-0710ML, Manufacturer Part Number 2=RMCF0402FT10M0, Manufacturer Part Number 3=CRCW040210M0FKED, Ohms=10000000, Part Number=RESC0402-10M0-1pct
R11: library part RESC0402-51K0-1pct, "RES 51.0K OHM 1% 1/16W 0402", Manufacturer 1=Yageo, Manufacturer 2="Stackpole Electronics", Manufacturer 3="Vishay Dale", Manufacturer 4="Panasonic Electronic Components", Manufacturer Part Number 1=RC0402FR-0751KL, Manufacturer Part Number 2=RMCF0402FT51K0, Manufacturer Part Number 3=CRCW040251K0FKED, Manufacturer Part Number 4=ERJ-2RKF5102X, Ohms=51000, Part Number=RESC0402-51K0-1pct
R12: library part RESC0402-10K0-1pct, "RES 10.0K OHM 1% 1/16W 0402", Manufacturer 1=Yageo, Manufacturer 2="Stackpole Electronics", Manufacturer 3="Vishay Dale", Manufacturer 4="Panasonic Electronic Components", Manufacturer Part Number 1=RC0402FR-0710KL, Manufacturer Part Number 2=RMCF0402FT10K0, Manufacturer Part Number 3=CRCW040210K0FKED, Manufacturer Part Number 4=ERJ-2RKF1002X, Ohms=10000, Part Number=RESC0402-10K0-1pct
R13: library part PVG3A102C01R00, "TRIMMER 1K OHM 0.25W J LEAD TOP", Manufacturer=Bourns, Max Power Dissipation=250mW, Resistance=1kR, Resistor Type=Cermet, Supplier Part Number 1=490-2643-6-ND, Temperature Coefficient=150ppm/°C, Tolerance=20%, ComponentLink1Description=https://datasheet.octopart.com/PVG3A102C01R00-Bourns-datasheet-154729832.pdf?src-supplier=Newark, ComponentLink1URL=https://datasheet.octopart.com/PVG3A102C01R00-Bourns-datasheet-154729832.pdf?src-supplier=Newark, ComponentLink2Description=https://datasheet.octopart.com/PVG3A102C01R00-Bourns-datasheet-82548162.pdf?src-supplier=Element14, ComponentLink2URL=https://datasheet.octopart.com/PVG3A102C01R00-Bourns-datasheet-82548162.pdf?src-supplier=Element14, ComponentLink3Description=https://www.bourns.com/docs/Product-Datasheets/pvg3.pdf?src-supplier=Digi-Key, ComponentLink3URL=https://www.bourns.com/docs/Product-Datasheets/pvg3.pdf?src-supplier=Digi-Key, ComponentLink4Description=http://www.bourns.com/docs/Product-Datasheets/pvg3.pdf?src-supplier=Digi-Key, ComponentLink4URL=http://www.bourns.com/docs/Product-Datasheets/pvg3.pdf?src-supplier=Digi-Key, ComponentLink5Description=https://www.mouser.com/ds/2/54/vg3-1084610.pdf?src-supplier=Mouser, ComponentLink5URL=https://www.mouser.com/ds/2/54/vg3-1084610.pdf?src-supplier=Mouser, Height=0.079inch, Manufacturer Part Number=PVG3A102C01R00, Mount="Surface Mount", Number of Turns=1, Packaging="Cut Tape", Pricing 1="1=1.44, 10=1.273, 25=1.1452, 50=1.103, 100=1.0605, 250=0.99688, 500=0.8484 (USD)", Stock 1=4867, Supplier 1=Digi-Key, Supplier 2=Mouser, Supplier Part Number 2=81-PVG3A102C01R00
R15: library part RESC0402-5K60-1pct, "RES 5.60K OHM 1% 1/16W 0402", Manufacturer 1=Yageo, Manufacturer 2="Stackpole Electronics", Manufacturer 3="Vishay Dale", Manufacturer 4="Panasonic Electronic Components", Manufacturer Part Number 1=RC0402FR-075K6L, Manufacturer Part Number 2=RMCF0402FT5K60, Manufacturer Part Number 3=CRCW04025K60FKED, Manufacturer Part Number 4=ERJ-2RKF5601X, Ohms=5600, Part Number=RESC0402-5K60-1pct
R16: library part RESC0402-17K8-1pct, "RES 17.8K OHM 1% 1/16W 0402", Manufacturer 1=Yageo, Manufacturer 2="Stackpole Electronics", Manufacturer 3="Vishay Dale", Manufacturer 4="Panasonic Electronic Components", Manufacturer Part Number 1=RC0402FR-0717K8L, Manufacturer Part Number 2=RMCF0402FT17K8, Manufacturer Part Number 3=CRCW040217K8FKED, Manufacturer Part Number 4=ERJ-2RKF1782X, Ohms=17800, Part Number=RESC0402-17K8-1pct
R17 R18: library part RESC0402-1K00-1pct, "RES 1.00K OHM 1% 1/16W 0402", Manufacturer 1=Yageo, Manufacturer 2="Stackpole Electronics", Manufacturer 3="Vishay Dale", Manufacturer 4="Panasonic Electronic Components", Manufacturer Part Number 1=RC0402FR-071KL, Manufacturer Part Number 2=RMCF0402FT1K00, Manufacturer Part Number 3=CRCW04021K00FKED, Manufacturer Part Number 4=ERJ-2RKF1001X, Ohms=1000, Part Number=RESC0402-1K00-1pct
R19: library part RESC0402-49R9-1pct, "RES 49.9 OHM 1% 1/16W 0402", Manufacturer 1=Yageo, Manufacturer 2="Stackpole Electronics", Manufacturer 3="Vishay Dale", Manufacturer 4="Panasonic Electronic Components", Manufacturer Part Number 1=RC0402FR-0749R9L, Manufacturer Part Number 2=RMCF0402FT49R9, Manufacturer Part Number 3=CRCW040249R9FKED, Manufacturer Part Number 4=ERJ-2RKF49R9X, Ohms=49.9, Part Number=RESC0402-49R9-1pct
R20: library part RESC0402-41K2-1pct, "RES 41.2K OHM 1% 1/16W 0402", Manufacturer 1=Yageo, Manufacturer 2="Stackpole Electronics", Manufacturer 3="Vishay Dale", Manufacturer 4="Panasonic Electronic Components", Manufacturer Part Number 1=RC0402FR-0741K2L, Manufacturer Part Number 2=RMCF0402FT41K2, Manufacturer Part Number 3=CRCW040241K2FKED, Manufacturer Part Number 4=ERJ-2RKF4122X, Ohms=41200, Part Number=RESC0402-41K2-1pct
R21: library part RESC0402-91K0-1pct, "RES 91.0K OHM 1% 1/16W 0402", Manufacturer 1=Yageo, Manufacturer 2="Stackpole Electronics", Manufacturer 3="Vishay Dale", Manufacturer 4="Panasonic Electronic Components", Manufacturer Part Number 1=RC0402FR-0791KL, Manufacturer Part Number 2=RMCF0402FT91K0, Manufacturer Part Number 3=CRCW040291K0FKED, Manufacturer Part Number 4=ERJ-2RKF9102X, Ohms=91000, Part Number=RESC0402-91K0-1pct
R22: library part RESC0402-10K2-1pct, "RES 10.2K OHM 1% 1/16W 0402", Manufacturer 1=Yageo, Manufacturer 2="Stackpole Electronics", Manufacturer 3="Vishay Dale", Manufacturer 4="Panasonic Electronic Components", Manufacturer Part Number 1=RC0402FR-0710K2L, Manufacturer Part Number 2=RMCF0402FT10K2, Manufacturer Part Number 3=CRCW040210K2FKED, Manufacturer Part Number 4=ERJ-2RKF1022X, Ohms=10200, Part Number=RESC0402-10K2-1pct
R23: library part RESC0402-18K0-1pct, "RES 18.0K OHM 1% 1/16W 0402", Manufacturer 1=Yageo, Manufacturer 2="Stackpole Electronics", Manufacturer 3="Vishay Dale", Manufacturer 4="Panasonic Electronic Components", Manufacturer Part Number 1=RC0402FR-0718KL, Manufacturer Part Number 2=RMCF0402FT18K0, Manufacturer Part Number 3=CRCW040218K0FKED, Manufacturer Part Number 4=ERJ-2RKF1802X, Ohms=18000, Part Number=RESC0402-18K0-1pct
R24: library part RESC0603-4K70-1pct, "RES 4.70K OHM 1% 1/10W 0603", Manufacturer 1=Yageo, Manufacturer 2="Stackpole Electronics", Manufacturer 3="Vishay Dale", Manufacturer 4="Panasonic Electronic Components", Manufacturer Part Number 1=RC0603FR-074K7L, Manufacturer Part Number 2=RMCF0603FT4K70, Manufacturer Part Number 3=CRCW06034K70FKEA, Manufacturer Part Number 4=ERJ-3EKF4701V, Ohms=4700, Part Number=RESC0603-4K70-1pct
U1: library part BUF802IRGTR, "WIDE-BANDWIDTH JFET BUFFER", Manufacturer="Texas Instruments", Supplier Part Number 1=296-BUF802IRGTRCT-ND, Manufacturer Part Number=BUF802IRGTR, Pricing 1="1=5.06, 10=4.541, 25=4.2928, 100=3.7206, 250=3.5298, 500=3.16728, 1000=2.88 (USD)", Stock 1=1253, Supplier 1=Digi-Key, Supplier 2=Mouser, Supplier Part Number 2=595-BUF802IRGTR
U2: library part OPA140AIDR, "IC OPAMP JFET 1 CIRCUIT 8SOIC", Case/Package=D, Input Bias Current=10pA, Input Offset Voltage (Vos)=30uV, Manufacturer="Texas Instruments", Max Dual Supply Voltage=18V, Max I/O Voltage=120uV, Max Operating Temperature=125°C, Max Supply Voltage=36V, Min Dual Supply Voltage=2.25V, Min Operating Temperature=-40°C, Min Supply Voltage=4.5V, Nominal Supply Current=2mA, Operating Supply Current=1.8mA, Output Current=36mA, Package Quantity=2500, Power Supply Rejection Ratio (PSRR)=140dB, Supplier Part Number 1=296-43606-6-ND, Voltage Gain=126dB, Common Mode Rejection Ratio=126dB, ComponentLink1Description=https://datasheet.ciiva.com/14459/sbos498a-14459066.pdf?src-supplier=Avnet, ComponentLink1URL=https://datasheet.ciiva.com/14459/sbos498a-14459066.pdf?src-supplier=Avnet, ComponentLink2Description=https://datasheet.ciiva.com/1815/opa140-1815515.pdf?src-supplier=Digi-Key, ComponentLink2URL=https://datasheet.ciiva.com/1815/opa140-1815515.pdf?src-supplier=Digi-Key, Contact Plating=Gold, Gain Bandwidth Product=11MHz, Lead Free="Lead Free", Manufacturer Part Number=OPA140AIDR, Nominal Gain Bandwidth Product=11MHz, Number of Channels=1, Number of Circuits=1, Number of Elements=1, Number of Pins=8, Operating Supply Voltage=18V, Output Current per Channel=36mA, Packaging="Tape and Reel", Pricing 1="1=4.01, 10=3.606, 25=3.4088, 100=2.9542, 250=2.80276, 500=2.5149, 1000=2.121 (USD)", Radiation Hardening=No, RoHS Compliant=Yes, Series=-, Slew Rate=20V/µs, Stock 1=3434, Supplier 1=Digi-Key, Supplier 2=Mouser, Supplier Part Number 2=595-OPA140AIDR, Supply Current=2mA, Technology=BIFET, Unity Gain Bandwidth Product=11MHz
U3: library part TPS7A3901DSCR, "IC REG LINEAR POS/NEG ADJ 10WSON", Dropout Voltage=500mV, Manufacturer="Texas Instruments", Max Input Voltage=33V, Max Operating Temperature=125°C, Max Output Voltage=-30V, Max Supply Current=904uA, Min Operating Temperature=-40°C, Min Output Voltage=0V, Output Current=150mA, Power Supply Rejection Ratio (PSRR)=69dB, Quiescent Current=150uA, Supplier Part Number 1=296-TPS7A3901DSCRCT-ND, ComponentLink1Description=http://www.ti.com/lit/ds/symlink/tps7a39.pdf?src-supplier=Digi-Key, ComponentLink1URL=http://www.ti.com/lit/ds/symlink/tps7a39.pdf?src-supplier=Digi-Key, ComponentLink2Description=http://www.ti.com/general/docs/suppproductinfo.tsp?distId=10&amp;gotoUrl=http%3A%2F%2Fwww.ti.com%2Flit%2Fgpn%2Ftps7a39&src-supplier=Digi-Key, ComponentLink2URL=http://www.ti.com/general/docs/suppproductinfo.tsp?distId=10&amp;gotoUrl=http%3A%2F%2Fwww.ti.com%2Flit%2Fgpn%2Ftps7a39&src-supplier=Digi-Key, Copyright="Copyright (C) 2022 Ultra Librarian. All rights reserved.", Manufacturer_Part_Number=TPS7A3901DSCR, Manufacturer Part Number=TPS7A3901DSCR, Mfr_Name="Texas Instruments", Mount="Surface Mount", Number of Regulators=2, Output Type=Adjustable, Packaging="Cut Tape", RefDes=RefDes, Series=-, Stock 1=0, Supplier 1=Digi-Key, Supplier 2=Mouser, Supplier Part Number 2=595-TPS7A3901DSCR, Type=DEV
U4: "Isolated DC/DC 1W 5-> +/-9V", Distributor PartN=811-2376-ND, DistributorAlt PartN=N/A, Manufacturer=Murata, Distributor=Digikey, DistributorAlt=N/A, Manufacturer PartN=MTU1D0509MC, Parameters="Isolated DC/DC 1W 5-> +/-9V"

## Free pads (board coordinates)
  oval 4x1.4 hole 1 slot 3.5 at 0 deg: 25(0.788,13.017)

## Via types
v1: diameter 0.457/0/0/0.457 (per signal layer), hole 0.254, Top to Bottom, tented both sides, 255 vias
v2: diameter 0.457/0/0.457/0.457 (per signal layer), hole 0.254, Top to Bottom, tented both sides, 3 vias

## Nets (pads, with @x,y where several pads share a name; then routed paths per layer and width w, separated by ;. In a path a pad name is that pad's centre, name@x,y a point inside that pad or via, vN(x,y) a via of type N, cw(c..) or ccw(c..) an arc to the next point about the centre after c; other vN are vias at no path point)
+9V: L3.1 U4.6 | length 13.7
  Top w0.7: L3.1 45.724,7.525 48.949,4.3 53.821,4.3 55.471,2.65 U4.6
-9V: L4.1 U4.4 | length 4.8
  Top w0.7: L4.1 50.241,1.6 50.391,1.75 U4.4
CGND: J2.A12 J2.B12 J2.S1 J2.S2 J2.S3 J2.S4 L1.4 R5.1 R7.1 | length 9.2
  Top w0.5: 61.981,7.975 J2.A12@64.431,7.975
  Top w0.7: L1.4 61.543,1.575 62.262,0.856 64.432,0.856 J2.S1 J2.B12 ; J2.A12@64.431,7.975 J2.A12 J2.S2
GND: C3.2 C9.2 C10.2 C11.1 C12.2 C13.1 C14.2 C15.1 C16.2 C17.1 C18.2 C19.1 C20.2 C21.1 C22.2 C23.1 C24.2 C25.2 D2.2 J3.2 J4.1 J5.1 R4.2 R8.2 R13.3 R22.2 U1.17 U3.4 U3.11 U4.5 | length 2.6
  Top w0.2: R4.2@6.789,16.988 J4.1@6.789,18.692 ; U3.4 U3.11@33.081,7.15
  other v1: 17.181,0.7 18.181,0.7 19.181,0.7 20.181,0.7 21.181,0.7 22.181,0.7 23.181,0.7 24.181,0.7 25.181,0.7 26.181,0.7 27.181,0.7 28.181,0.7 29.181,0.7 30.181,0.7 31.181,0.7 32.181,0.7 33.181,0.7 34.181,0.7 35.181,0.7 36.181,0.7 37.181,0.7 38.181,0.7 39.181,0.7 40.181,0.7 41.181,0.7 42.181,0.7 52.324,0.855 53.556,0.855 20.131,1.825 52.324,1.855 53.556,1.855 21.056,2.775 52.324,2.855 53.556,2.855 12.231,3 13.231,3 14.231,3 15.231,3 16.231,3 11.524,3.707 10.817,4.414 11.991,4.8 12.991,4.8 13.991,4.8 10.11,5.121 25.606,5.45 9.454,5.778 26.556,6.425 11.991,6.775 12.991,6.775 13.991,6.775 10.338,7.094 33.006,7.652 34.156,7.65 9.407,8 9.407,9 12.131,8.995 12.881,8.995 13.631,8.995 16.256,9 9.407,10 16.256,10 26.881,10.875 16.256,11 21.231,11.75 66.939,13.033 67.939,13.033 68.939,13.033 69.939,13.033 12.881,13.5 66.947,14.233 67.947,14.233 68.947,14.233 69.947,14.233 20.395,14.633 21.919,14.633 23.443,14.633 24.967,14.633 26.491,14.633 27.705,15.333 29.229,15.533 30.753,15.533 32.277,15.533 33.801,15.533 35.325,15.533 36.849,15.533 38.373,15.533 39.897,15.533 41.421,15.533 42.945,15.533 44.469,15.533 45.993,15.533 47.517,15.533 49.041,15.533 50.565,15.533 52.089,15.533 53.613,15.533 55.137,15.533 56.661,15.533 58.185,15.533 59.709,15.533 61.233,15.533 62.757,15.533 64.281,15.533 65.805,15.533 19.816,15.967 21.34,15.967 22.864,15.967 24.388,15.967 25.912,15.967 16.389,16 27.126,16.667 28.65,16.867 30.174,16.867 31.698,16.867 33.222,16.867 34.746,16.867 36.27,16.867 37.794,16.867 39.318,16.867 40.842,16.867 42.366,16.867 43.89,16.867 45.414,16.867 46.938,16.867 48.462,16.867 49.986,16.867 51.51,16.867 53.034,16.867 54.558,16.867 56.082,16.867 57.606,16.867 59.13,16.867 60.654,16.867 62.178,16.867 63.702,16.867 65.226,16.867 9.331,17 16.389,17 9.331,18 16.389,18 66.931,18.1 67.931,18.1 68.931,18.1 69.931,18.1 12.3,18.132 9.331,19 10.338,19 15.939,19.3 16.939,19.3 17.939,19.3 18.939,19.3 19.939,19.3 20.939,19.3 21.939,19.3 22.939,19.3 23.939,19.3 24.939,19.3 25.939,19.3 26.939,19.3 27.939,19.3 28.939,19.3 29.939,19.3 30.939,19.3 31.939,19.3 32.939,19.3 33.939,19.3 34.939,19.3 35.939,19.3 36.939,19.3 37.939,19.3 38.939,19.3 39.939,19.3 40.939,19.3 41.939,19.3 42.939,19.3 43.939,19.3 44.939,19.3 45.939,19.3 46.939,19.3 47.939,19.3 48.939,19.3 49.939,19.3 50.939,19.3 51.939,19.3 52.939,19.3 53.939,19.3 54.939,19.3 55.939,19.3 56.939,19.3 57.939,19.3 58.939,19.3 59.939,19.3 60.939,19.3 61.939,19.3 62.939,19.3 63.939,19.3 64.939,19.3 65.939,19.3 66.939,19.3 67.939,19.3 68.939,19.3 69.939,19.3
NetC1_1: C1.1 C5.2 R3.2 R4.1 | length 3.3
  Top w0.2: R4.1@6.814,16.15 R3.2 6.881,14.982 C5.2 C1.1
NetC1_2: C1.2 R2.1 | length 1.1
  Top w0.2: C1.2 R2.1
NetC2_1: C2.1 R11.1 R12.1 U2.2 | length 8.3
  Top w0.2: R11.1 R12.1 C2.1 ; U2.2@17.431,7.025 U2.2@17.431,7.21 ; C2.1@17.431,11.632 C2.1 ; U2.2 U2.2@17.431,7.21 ; U2.2@17.431,7.21 17.106,7.21 16.948,7.368 16.948,9.364 17.431,9.847 17.549,9.965 C2.1
NetC2_2: C2.2 R15.2 U2.6 | length 8.5
  Top w0.203: C2.2 18.549,11.715 R15.2 18.549,9.832 22.441,5.94 U2.6
NetC3_1: C3.1 R15.1 U1.4 | length 11.9
  Top w0.2: C3.1 19.549,10.685 R15.1 v2(20.231,10.65)
  Top w0.203: v2(11.414,12.033) U1.4@11.414,12.75
  Signal/Power w0.2: 16.311,12.033 18.848,12.033 v2(20.231,10.65)
  Signal/Power w0.203: v2(11.414,12.033) 16.311,12.033
NetC4_1: C4.1 R1.2 R3.1 R6.1 | length 3.3
  Top w0.2: R1.2 R6.1 C4.1 5.781,14.982 R3.1
NetC4_2: C4.2 C5.1 | length 1.1
  Top w0.2: C4.2 C5.1
NetC6_1: C6.1 R20.2 R22.1 U3.9 | length 0.3
  Top w0.2: R22.1@38.064,8.15 R22.1
NetC7_1: C7.1 L1.2 L2.1 | length 7.9
  Top w0.9: L1.2 58.818,4.974 59.818,5.974 C7.1 59.818,9.229 61.389,10.8 L2.1
NetC8_1: C8.1 R21.1 R23.1 U3.7
NetC9_1: C9.1 U3.3 | length 1.2
  Top w0.2: C9.1@30.939,7.65 U3.3
NetC26_1: C26.1 L2.2 U4.1 | length 8.4
  Top w0.9: C26.1 55.471,11.85 ; U4.1 55.471,11.85 ; L2.2@58.439,11.85 55.471,11.85 ; L2.2@58.439,11.975 58.489,11.925 L2.2
NetD2_1: D2.1 R24.2 | length 1.7
  Top w0.2: D2.1 R24.2
NetJ2_A5: J2.A5 R5.2 | length 4.2
  Top w0.2: R5.2 61.543,6.559 63.377,4.725 J2.A5
NetJ2_A9: J2.A9 J2.B9 L1.1 | length 8.9
  Top w0.7: L1.1 61.543,4.574 62.392,3.725 J2.B9 64.511,3.755 65.511,3.755 66.006,4.25 66.006,6.125 65.436,6.695 64.511,6.695 J2.A9
NetJ2_B5: J2.B5 R7.2 | length 2.7
  Top w0.2: R7.2 62.781,6.296 63.353,5.725 J2.B5
NetR2_2: R2.2 R10.1 U1.2 | length 2.4
  Top w0.2: R2.2 R10.1 10.414,13.75 U1.2
NetR6_2: R6.2 R8.1 R9.1 | length 15.8
  Top w0.2: R6.2 4.681,11.525 10.306,5.9 R9.1 R8.1
NetR9_2: R9.2 U2.3 | length 1.6
  Top w0.2: R9.2 18.066,5.9 U2.3
NetR10_2: R10.2 U1.3 | length 1.3
  Top w0.2: R10.2 10.413,13.25 U1.3
NetR11_2: R11.2 R19.1 U1.11 | length 2.4
  Top w0.2: U1.11@14.361,13.75 15.357,13.75 15.557,13.95 R11.2@15.557,12.85
NetR12_2: R12.2 R13.1 R13.2 | length 8.3
  Top w0.2: R12.2 21.269,12.85 22.119,12 R13.2 23.621,12 24.771,13.15 R13.1
NetR16_1: R16.1 U1.7 | length 1.2
  Top w0.2: U1.7 13.131,10.831 13.138,10.825 R16.1@13.139,10.825
NetR17_1: R17.1 U1.15 U1.16
NetR18_1: R18.1 U1.13 U1.14
NetR23_2: R23.2 U3.8
OUT: J3.1 R19.2 | length 52.8
  Top w0.343: R19.2 17.304,13.95 ccw(c17.304,14.377) 17.606,14.075 18.165,14.634 cw(c19.773,13.027) 19.773,15.3 25.606,15.3 ; 25.631,15.3 ccw(c25.631,17.574) 26.935,15.711 ; 26.995,15.751 cw(c28.331,13.911) 28.331,16.185 ; 28.381,16.2 J3.1
TIP: pad.25 R1.1 | length 2.8
  Top w0.2: pad.25@0.813,13.017 1.013,13.017 R1.1
USB_GND: C7.2 C26.2 L1.3 U4.3
  other v1: 58.081,1.225 59.54,1.225 58.081,2.225 59.54,2.225 49.839,7.343 50.939,7.343 57.071,7.468 49.839,8.343 50.939,8.343 57.306,8.325 58.306,8.325 49.839,9.393 50.939,9.393 51.181,11.35 51.181,12.35
V+: C22.1 C24.1 L3.2 U3.1 U3.2 | length 5
  Top w0.9: C24.1 42.152,9.212 43.376,10.437 43.376,10.973 43.903,11.5 45.674,11.5 L3.2
  other v1: 31.981,11.925 32.681,11.925 44.779,12.129 45.779,12.129 46.779,12.129 31.981,12.625 32.681,12.625
V-: C23.2 C25.1 L4.2 U3.5 | length 4.6
  Top w0.9: C25.1 42.152,6.434 43.278,5.307 43.278,5.077 43.805,4.55 45.674,4.55 L4.2
  other v1: 31.981,2.65 32.681,2.65 31.981,3.35 32.681,3.35 44.779,3.884 45.779,3.884 46.779,3.884
VCC: C6.2 C10.1 C12.1 C14.1 C16.1 C18.1 C20.1 R17.2 R20.1 R24.1 U1.1 U1.12 U2.7 U3.10 | length 0.9
  Top w0.203: R24.1 v1(24.731,17.725)
  other v1: 26.556,8.225 25.606,9.175 35.831,10.1 36.598,10.1 37.365,10.1 38.131,10.1 11.381,19 12.131,19 12.881,19 13.631,19 14.381,19
VEE: C8.2 C11.2 C13.2 C15.2 C17.2 C19.2 C21.2 R16.2 R18.2 R21.2 U1.5 U1.6 U1.8 U1.9 U1.10 U2.4 U3.6 | length 15.2
  Top w0.203: R18.2 v2(13.431,17.85)
  Signal/Power w0.203: v2(13.431,17.85) 12.281,16.7 12.281,12.4 19.606,12.4 20.481,11.525
  other v1: 18.331,1.825 17.356,2.775 35.831,5.1 36.598,5.1 37.365,5.1 38.131,5.1 11.381,8.075 12.131,8.075 12.881,8.075 13.631,8.075 14.381,8.075
pads on no net: U2.1 U2.5 U2.8
copper on no net: | length 0.6
  Top w0.2: 17.549,8.48 18.106,8.48

## Polygon pours and split planes (outlines as drawn)
GND on Top "GND_L01_P110" (solid, pour order 110): 9.081,0 70.881,0 70.881,20 3.938,20 3.938,17.564 9.081,17.564 9.081,16.185 9.947,15.575 10.781,15.575 10.781,11.525 10.104,11.525 9.081,10.637
VEE on Top "VEE_L01_P035" (solid, pour order 35): 10.931,13.375 14.881,13.375 14.881,7.6 10.931,7.6
VCC on Top "VCC_L01_P034" (solid, pour order 34): 10.931,14.125 10.931,20 14.881,20 14.881,14.125
V- on Top "V-_L01_P106" (solid, pour order 106): 31.656,6.775 32.481,6.775 32.481,5.85 33.031,5.85 33.031,2.3 31.656,2.3
V+ on Top "V+_L01_P102" (solid, pour order 102): 31.656,8.025 32.481,8.025 32.481,9.45 33.006,9.45 33.006,13 31.656,13
NetC6_1 on Top "NETC6_1_L01_P096" (solid, pour order 96): 34.681,8.675 38.631,8.675 38.631,8.05 34.681,8.05
NetC8_1 on Top "NETC8_1_L01_P094" (solid, pour order 94): 34.681,7.275 34.681,6.05 38.631,6.05 38.631,7.275
NetR23_2 on Top "NETR23_2_L01_P100" (solid, pour order 100): 34.681,7.775 34.681,7.525 38.631,7.525 38.631,7.775
VEE on Top "VEE_L01_P092" (solid, pour order 92): 35.531,5.6 34.681,5.6 34.681,6.775 35.281,6.775 35.281,6.275 38.431,6.275 38.431,1.95 35.531,1.95
VCC on Top "VCC_L01_P090" (solid, pour order 90): 35.281,9.025 35.281,8.525 34.681,8.525 34.681,9.7 35.531,9.7 35.531,13.35 38.431,13.35 38.431,9.025
NetR17_1 on Top "NETR17_1_L01_P031" (solid, pour order 31): 11.981,14.6 12.731,14.6 12.731,16.55 11.981,16.55
VCC on Top "VCC_L01_P048" (solid, pour order 48): 24.281,6.9 24.281,7.675 25.056,7.675 26.831,7.675 26.831,9.4 22.731,9.4 22.731,6.9
VEE on Top "VEE_L01_P046" (solid, pour order 46): 17.131,4.975 18.881,4.975 18.881,1.5 17.131,1.5
NetR18_1 on Top "NETR18_1_L01_P030" (solid, pour order 30): 13.031,14.6 13.031,16.55 13.781,16.55 13.781,14.6
VCC on Signal/Power "VCC_L03_P066" (solid, pour order 66): 10.931,14.625 12.043,14.625 12.043,12.369 23.931,12.369 23.931,7.652 38.907,7.652 38.907,18.745 15.031,18.745 15.018,20 10.931,20
VEE on Signal/Power "VEE_L03_P070" (solid, pour order 70): 41.88,1.088 41.88,20 15.564,20 10.931,20 10.931,5.325 12.544,3.625 16.791,3.625 16.791,1.088
V- on Signal/Power "V-_L03_P062" (solid, pour order 62): 31.673,1.088 47.081,1.088 47.081,4.294 43.556,4.294 43.556,3.625 31.673,3.625
V+ on Signal/Power "V+_L03_P058" (solid, pour order 58): 31.673,11.575 31.673,14.2 47.081,14.2 47.081,11.575
GND on Bottom "GND_L04_P116" (solid, pour order 116): 9.893,15.583 11.938,15.583 11.938,11.544 10.058,11.544 9.017,10.68 9.017,0 70.945,0 70.945,20 3.938,20 3.938,17.564 9.068,17.564 9.068,16.199
USB_GND on Bottom "USB_GND_L04_P115" (solid, pour order 115): 61.863,13 49.447,13 49.381,13.065 49.381,7 56.881,7 56.881,0 61.863,0
CGND on Bottom "CGND_L04_P114" (solid, pour order 114): 60.381,0 60.381,10.5 70.881,10.5 70.945,10.437 70.945,0 60.381,0
GND on Ground "GND_L02_P112" (solid, pour order 112): 3.938,17.564 9.031,17.564 9.031,16.437 10.07,15.5 10.931,15.5 12.041,15.5 12.041,11.544 10.057,11.544 9.031,10.691 9.031,0 70.881,0 70.881,20 9.081,20 3.938,20

## Other copper
Top:
  pour cut-out: 56.981,0.267 56.908,6.874 49.263,6.874 49.263,13.35 61.981,13.35 61.981,10.437 70.688,10.442 70.688,0.242